# Altium PCB FinalBoard.PcbDoc
Units mil, origin at the board's own origin, x right, y up, seen from the top; angles counter-clockwise.
Board outline 7840 x 6265 mil, 2 copper layers (Top Layer, Bottom Layer); 73 components, 79 nets, 293 pads, 2 vias.
Unrouted connection lines stored in the file: 156.
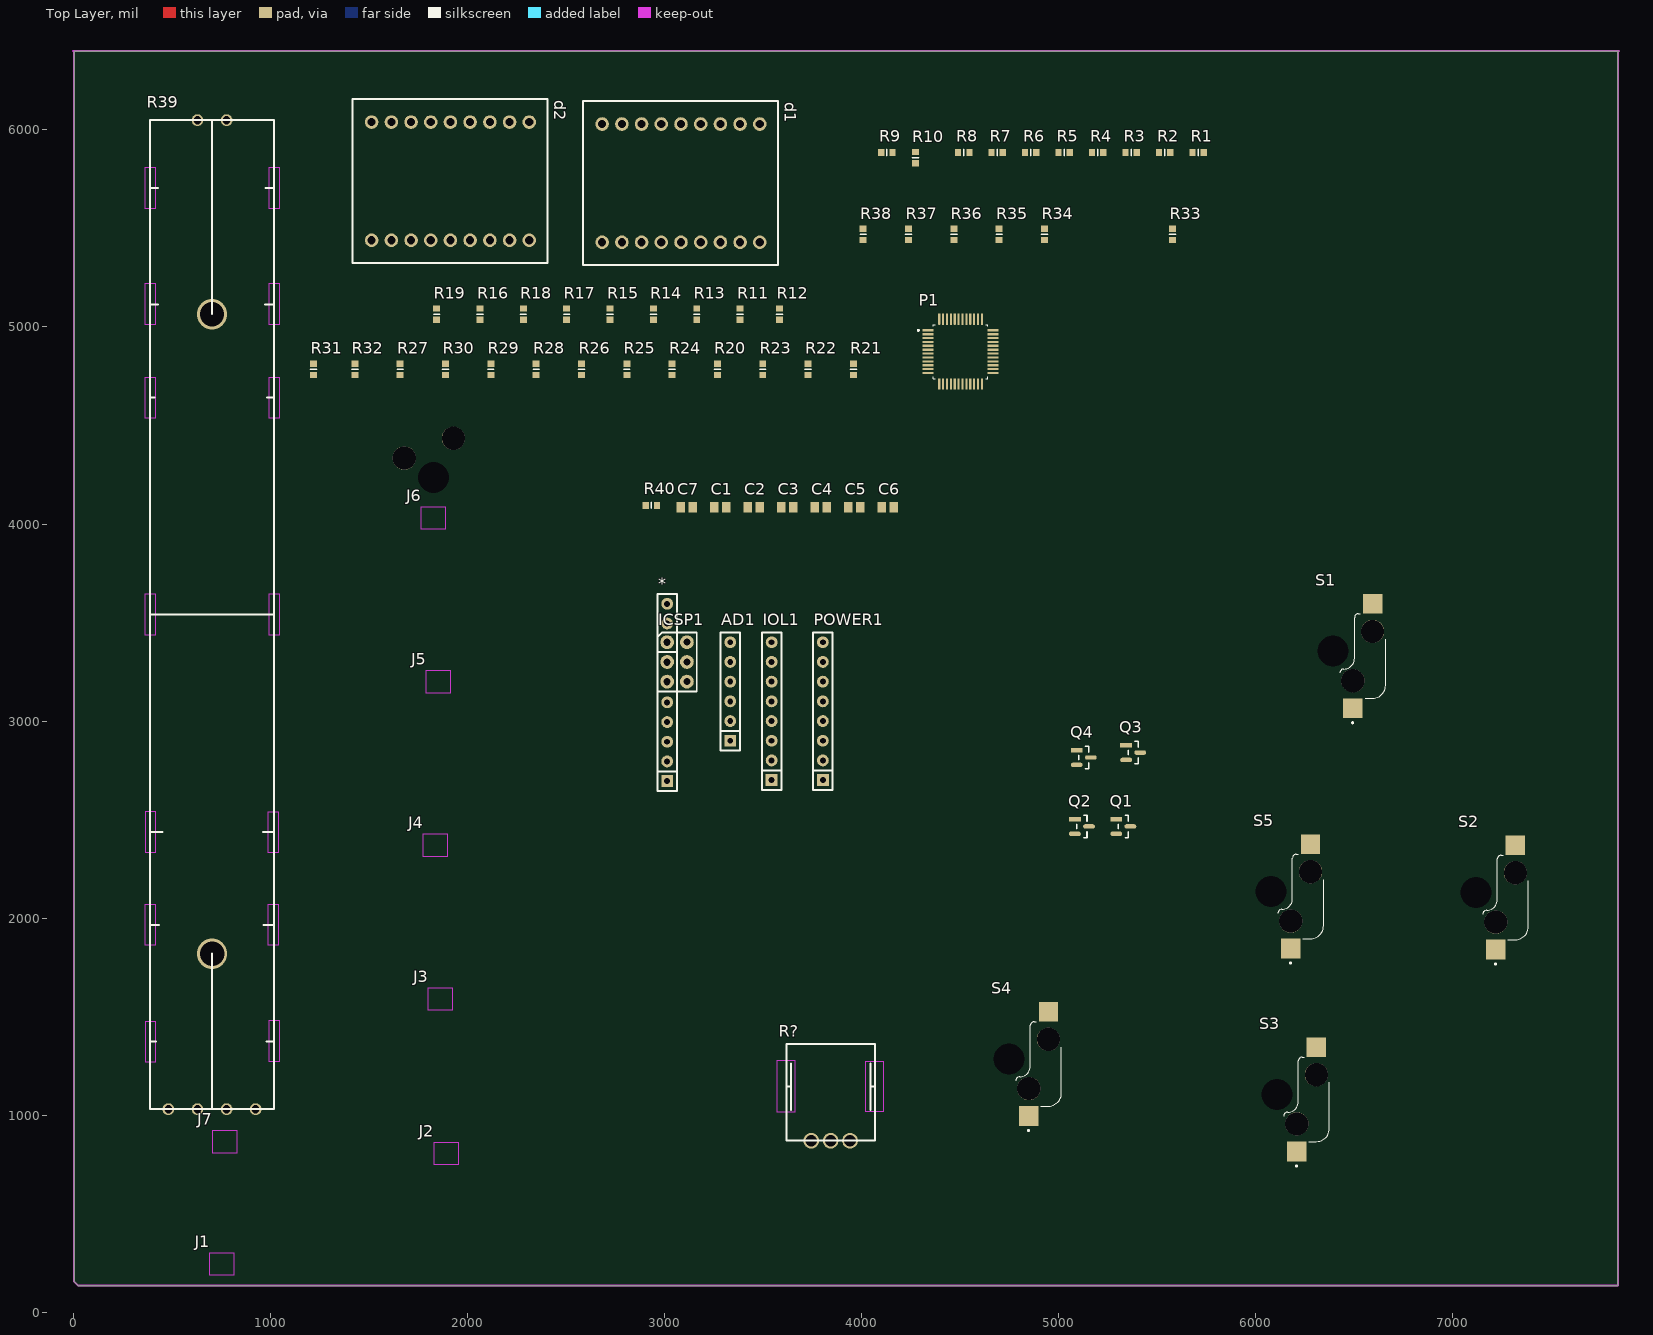
[diagram p0: Top Layer view]
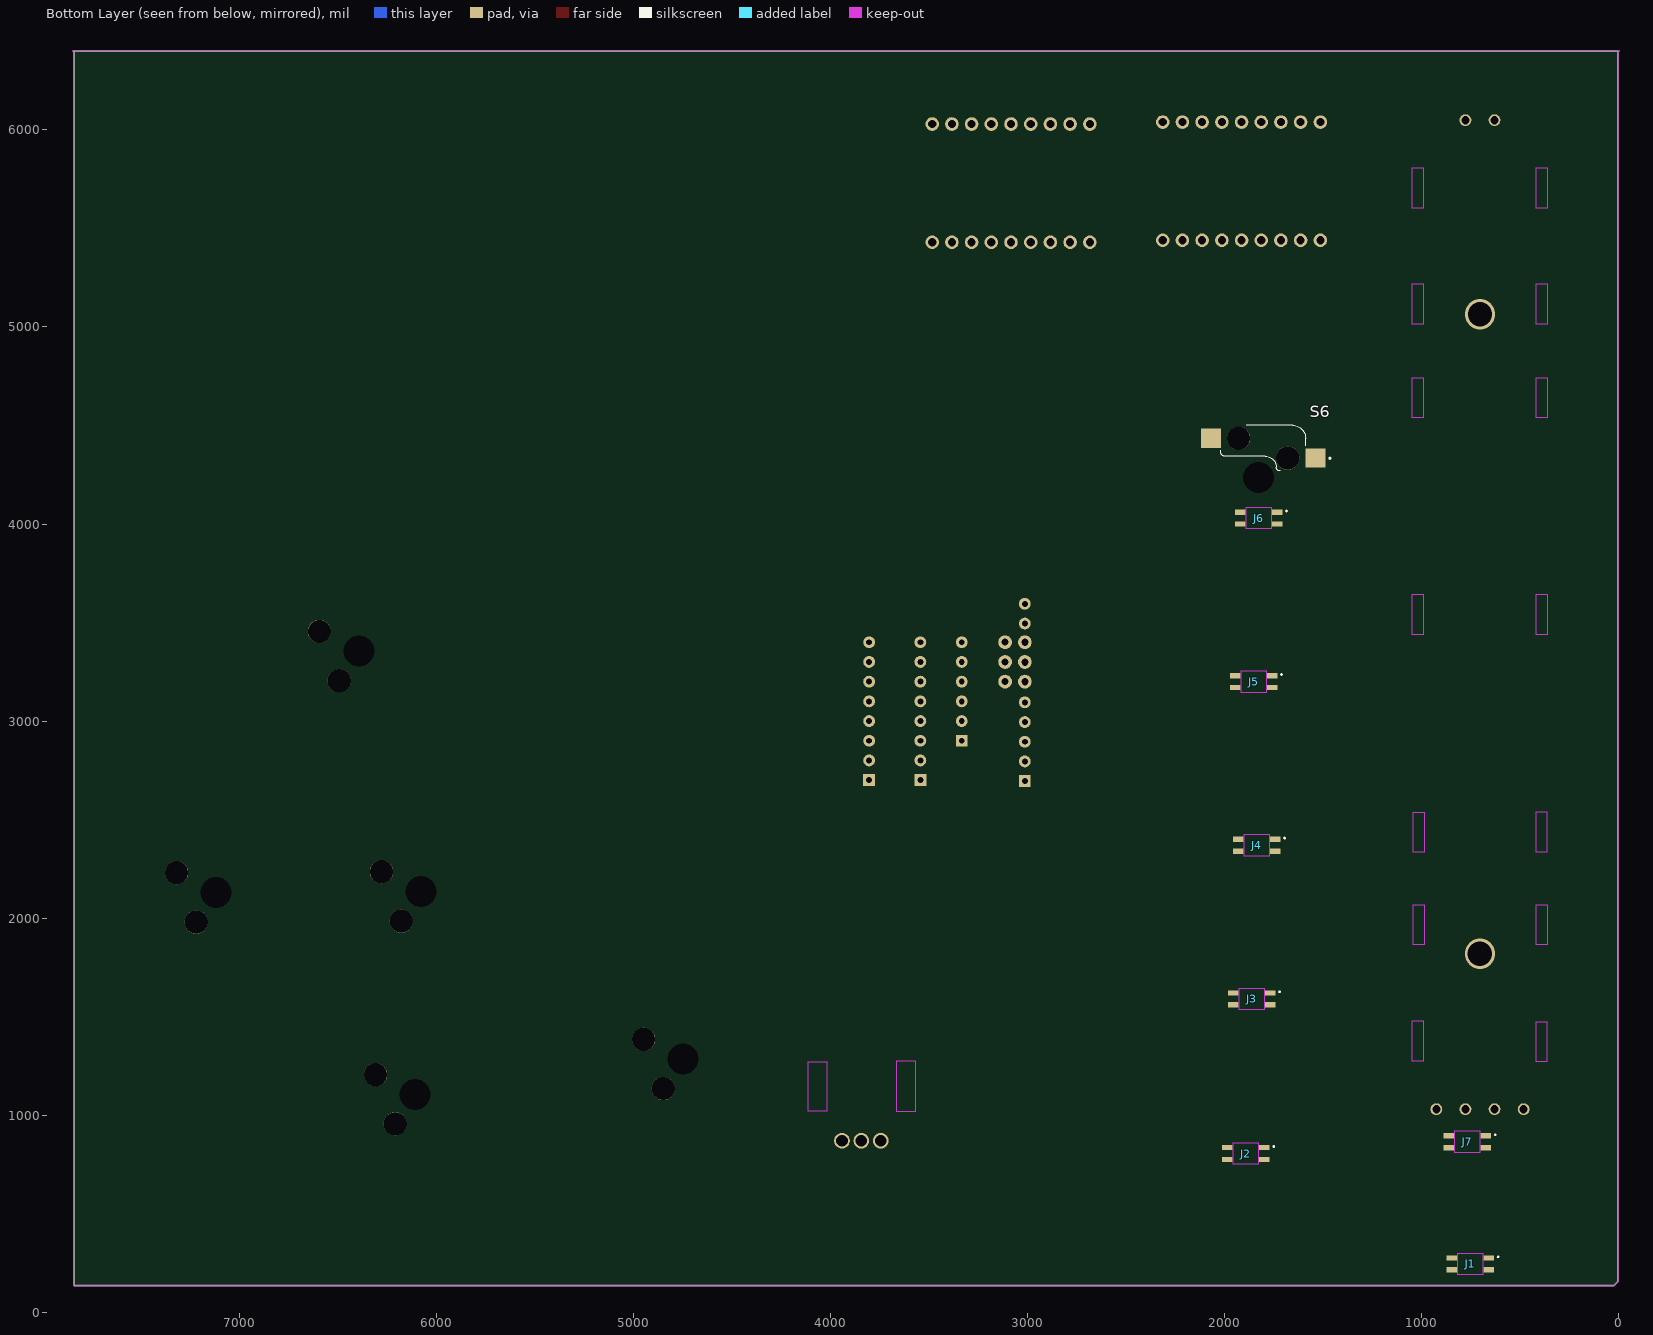
[diagram p1: Bottom Layer view, seen from below]

## Layer stack, top to bottom
Top Solder: solder mask 0.4, Solder Resist, Dk 3.5
Top Layer: signal copper 1.4
Dielectric 1: dielectric 12.6, FR-4, Dk 4.8
Bottom Layer: signal copper 1.4
Bottom Solder: solder mask 0.4, Solder Resist, Dk 3.5

## Board outline
25,135 5,155 5,6400 7845,6400 7840,6395 7840,135

## Design rules (kind name [scope] priority, off if disabled: settings)
Clearance [All] p1: gap=10 ignorepadtopadclearanceinfootprint=FALSE except(0: Arc-Hole Track-Hole SMDPad-Hole THPad-Hole Via-Hole Fill-Hole Poly-Hole Region-Hole Text-Hole)
PolygonConnect [All] p1: connectstyle=Relief reliefconductorwidth=10 reliefentries=4 polygonreliefangle="90 Angle" airgapwidth=10
RoutingVias [All] p1: holewidth=28 width=50 viastyle="Through Hole" minholewidth=28 minwidth=50 maxholewidth=28 maxwidth=50
SolderMaskExpansion [All] p1: expansion=4 istentingtop=FALSE
Width [All] p1: maxlimit=10 minlimit=10 preferedwidth=10
30 further rules are at their usual default settings.

## Components (designator, comment, footprint, x,y, rotation, side; value= is the part's Value field where it differs from the comment)
* "IOH" "Header 10x1 8.5mm" 3015,2695 r90 top
AD1 "AD" "Header 6x1 8.5mm" 3335,2900 r90 top
C1 "104uF, 20%" 0805_CAP_HD 3285,4085 r0 top
C2 "104uF, 20%" 0805_CAP_HD 3455,4085 r0 top
C3 "104uF, 20%" 0805_CAP_HD 3625,4085 r0 top
C4 "104uF, 20%" 0805_CAP_HD 3795,4085 r0 top
C5 "104uF, 20%" 0805_CAP_HD 3965,4085 r0 top
C6 "104uF, 20%" 0805_CAP_HD 4135,4085 r0 top
C7 "104uF, 20%" 0805_CAP_HD 3115,4085 r0 top
d1 "segdisplay" PCBComponent_1 2503.31,5314.23 r0 top
d2 "segdisplay" PCBComponent_1 1333.31,5324.23 r0 top
ICSP1 "ICSP" ICSP 3015,3400 r0 top
IOL1 "IOL" "Header 8x1 8.5mm" 3545,2700 r90 top
J1 "SK6812MINI" LED-3535 781,244.87 r180 top
J2 "SK6812MINI" LED-3535 1920,805 r180 top
J3 "SK6812MINI" LED-3535 1890,1590 r180 top
J4 "SK6812MINI" LED-3535 1865,2370 r180 top
J5 "SK6812MINI" LED-3535 1880,3200 r180 top
J6 "SK6812MINI" LED-3535 1855,4030 r180 top
J7 "SK6812MINI" LED-3535 796,864.87 r180 top
P1 "PCU9656B" QFP50P900X900X160-48N 4503.9,4874.76 r0 top
POWER1 "POWER_UNO" "Header 8x1 8.5mm" 3805,2700 r90 top
Q1 "BSS138" FP-318-08-IPC_B 5330,2465 r0 top
Q2 "BSS138" FP-318-08-IPC_B 5120,2465 r0 top
Q3 "BSS138" FP-318-08-IPC_B 5380,2840 r0 top
Q4 "BSS138" FP-318-08-IPC_B 5129.17,2815 r0 top
R1 "10K, 1%" 0603_RES_HD 5710,5885 r0 top
R2 "10K, 1%" 0603_RES_HD 5540,5885 r0 top
R3 "10K, 1%" 0603_RES_HD 5370,5885 r0 top
R4 "10K, 1%" 0603_RES_HD 5200,5885 r0 top
R5 "10K, 1%" 0603_RES_HD 5030,5885 r0 top
R6 "10K, 1%" 0603_RES_HD 4860,5885 r0 top
R7 "10K, 1%" 0603_RES_HD 4690,5885 r0 top
R8 "10K, 1%" 0603_RES_HD 4520,5885 r0 top
R9 "10K, 1%" 0603_RES_HD 4130,5885 r0 top
R10 "10K, 1%" 0603_RES_HD 4275,5860 r90 top
R11 "10K, 1%" 0603_RES_HD 3385,5065 r90 top
R12 "10K, 1%" 0603_RES_HD 3585,5065 r90 top
R13 "10K, 1%" 0603_RES_HD 3165,5065 r90 top
R14 "10K, 1%" 0603_RES_HD 2945,5065 r90 top
R15 "10K, 1%" 0603_RES_HD 2725,5065 r90 top
R16 "10K, 1%" 0603_RES_HD 2065,5065 r90 top
R17 "10K, 1%" 0603_RES_HD 2505,5065 r90 top
R18 "10K, 1%" 0603_RES_HD 2285,5065 r90 top
R19 "10K, 1%" 0603_RES_HD 1845,5065 r90 top
R20 "10K, 1%" 0603_RES_HD 3270,4785 r90 top
R21 "10K, 1%" 0603_RES_HD 3960,4785 r90 top
R22 "10K, 1%" 0603_RES_HD 3730,4785 r90 top
R23 "10K, 1%" 0603_RES_HD 3500,4785 r90 top
R24 "10K, 1%" 0603_RES_HD 3040,4785 r90 top
R25 "10K, 1%" 0603_RES_HD 2810,4785 r90 top
R26 "10K, 1%" 0603_RES_HD 2580,4785 r90 top
R27 "10K, 1%" 0603_RES_HD 1660,4785 r90 top
R28 "10K, 1%" 0603_RES_HD 2350,4785 r90 top
R29 "10K, 1%" 0603_RES_HD 2120,4785 r90 top
R30 "10K, 1%" 0603_RES_HD 1890,4785 r90 top
R31 "10K, 1%" 0603_RES_HD 1220,4785 r90 top
R32 "10K, 1%" 0603_RES_HD 1430,4785 r90 top
R33 "10K, 1%" 0603_RES_HD 5580,5470 r90 top
R34 "10K, 1%" 0603_RES_HD 4930,5470 r90 top
R35 "10K, 1%" 0603_RES_HD 4700,5470 r90 top
R36 "10K, 1%" 0603_RES_HD 4470,5470 r90 top
R37 "10K, 1%" 0603_RES_HD 4240,5470 r90 top
R38 "10K, 1%" 0603_RES_HD 4010,5470 r90 top
R39 "10k" sliderpot 410,1155 r90 top
R40 "10K, 1%" 0603_RES_HD 2935,4095 r0 top
R? "normalpot" normalpot 3785,1065 r0 top
S1 "PG151101S11" SW_PG151101S11 6545,3330 r90 top
S2 "PG151101S11" SW_PG151101S11 7270,2105 r90 top
S3 "PG151101S11" SW_PG151101S11 6260,1080.24 r90 top
S4 "PG151101S11" SW_PG151101S11 4900,1260 r90 top
S5 "PG151101S11" SW_PG151101S11 6230,2110 r90 top
S6 "PG151101S11" SW_PG151101S11 1805,4385 r0 bottom

## Footprints (in the part's own frame and the unit in brackets; to place one, negate y for a bottom-side part, rotate by r counter-clockwise, add the part's x,y. Pads: shape width x height; smd on the part's side, far side on the other; paste and mask are expansions set on the pad)
0603_RES_HD [mm] "Chip Resistor, 2-Leads, Body 1.60x0.85mm, IPC High Density"
  rect 0.8x0.9 smd: 1(-0.725,0) 2(0.725,0)
  silkscreen extent 0,-0.4 0,0.4, body extent -0.87,-0.48 0.87,0.48, height 0.55
0805_CAP_HD [mm] "Chip Capacitor, 2-Leads, Body 2.00x1.25mm, IPC High Density"
  rect 1.1x1.4 smd: 1(-0.775,0) 2(0.775,0)
  body extent -1.1,-0.72 1.1,0.73, height 1.4
FP-318-08-IPC_B [mm]
  rect 1.524x0.578 smd paste+0 mask+0: 1(-0.91,0.95)
  rrect100% 1.524x0.578 smd paste+0 mask+0: 2(-0.91,-0.95) 3(0.91,0)
  silkscreen extent -0.65,-1.45 0.65,1.45, body extent -1.92,-1.7 1.92,1.7, height 0.25
"Header 6x1 8.5mm" [mil] "Stackable 6 pin header"
  rect 60x60 hole 30: 1(0,0)
  round 60 hole 30: 2(100,0) 3(200,0) 4(300,0) 5(400,0) 6(500,0)
  silkscreen extent -50,-50 550,50, body extent -50,-50 550,50, height 335
"Header 8x1 8.5mm" [mil] "Stackable 8 pin header"
  rect 60x60 hole 30: 1(0,0)
  round 60 hole 30: 2(100,0) 3(200,0) 4(300,0) 5(400,0) 6(500,0) 7(600,0) 8(700,0)
  silkscreen extent -50,-50 750,50, body extent -50,-50 750,50, height 335
"Header 10x1 8.5mm" [mil] "Stackable 10 pin header"
  rect 60x60 hole 30: 1(0,0)
  round 60 hole 30: 2(100,0) 3(200,0) 4(300,0) 5(400,0) 6(500,0) 7(600,0) 8(700,0) 9(800,0) 10(900,0)
  silkscreen extent -50,-50 950,50, body extent -50,-50 950,50, height 335
ICSP [mil]
  round 70 hole 35.43: 1(0,0) 2(100,0) 3(0,-100) 4(100,-100) 5(0,-200) 6(100,-200)
  silkscreen extent -50,-250 150,50, body extent -50,-250 150,50, height 485
LED-3535 [mm]
  rect 1.34x0.68 smd far side: 1(-1.702,0.765) 2(-1.702,-0.765) 3(3.073,-0.765) 4(3.073,0.765)
  Keep-Out Layer region: -0.914,-1.397 2.286,-1.397 2.286,1.403 -0.914,1.403
normalpot [mil]
  round 79.5 hole 59.06: 1(-39.02,-195) 2(59.41,-195) 3(157.83,-195)
  Keep-Out Layer region: 236,-45 330,-45 330,207 236,207
  Keep-Out Layer region: -213,-49 -119,-49 -119,210 -213,210
  silkscreen extent -165,-195 284,297
PCBComponent_1 [mm]
  round 1.75 hole 1.05: 1(4.615,18.181) 2(7.155,18.181) 3(9.695,18.181) 4(12.235,18.181) 5(14.775,18.181) 6(17.315,18.181) 7(19.855,18.181) 8(22.395,18.181) 9(24.935,18.181) 10(4.615,2.941) 11(7.155,2.941) 12(9.695,2.941) 13(12.235,2.941) 14(14.775,2.941) 15(17.315,2.941) 16(19.855,2.941) 17(22.395,2.941) 18(24.935,2.941)
  silkscreen extent 2.16,0 27.26,21.15
QFP50P900X900X160-48N [mm]
  rrect25% 1.44x0.28 smd: 1(-4.185,2.75) 2(-4.185,2.25) 3(-4.185,1.75) 4(-4.185,1.25) 5(-4.185,0.75) 6(-4.185,0.25) 7(-4.185,-0.25) 8(-4.185,-0.75) 9(-4.185,-1.25) 10(-4.185,-1.75) 11(-4.185,-2.25) 12(-4.185,-2.75) 25(4.185,-2.75) 26(4.185,-2.25) 27(4.185,-1.75) 28(4.185,-1.25) 29(4.185,-0.75) 30(4.185,-0.25) 31(4.185,0.25) 32(4.185,0.75) 33(4.185,1.25) 34(4.185,1.75) 35(4.185,2.25) 36(4.185,2.75)
  rrect25% 0.28x1.44 smd: 13(-2.75,-4.185) 14(-2.25,-4.185) 15(-1.75,-4.185) 16(-1.25,-4.185) 17(-0.75,-4.185) 18(-0.25,-4.185) 19(0.25,-4.185) 20(0.75,-4.185) 21(1.25,-4.185) 22(1.75,-4.185) 23(2.25,-4.185) 24(2.75,-4.185) 37(2.75,4.185) 38(2.25,4.185) 39(1.75,4.185) 40(1.25,4.185) 41(0.75,4.185) 42(0.25,4.185) 43(-0.25,4.185) 44(-0.75,4.185) 45(-1.25,4.185) 46(-1.75,4.185) 47(-2.25,4.185) 48(-2.75,4.185)
  silkscreen extent -5.54,-3.5 3.5,3.5, body extent -4.5,-4.5 4.5,4.5, height 1.6
sliderpot [mil]
  round 60 hole 41.34: 1(-125,-221.09) 2(-125,-73.46) 3(4894.37,-221.09) (1)(-125,-368.73) (2)(-125,-516.37) (3)(4894.37,-368.73)
  Keep-Out Layer region: 115.28,45 115.28,-10.12 320,-10.12 320,45
  Keep-Out Layer region: 708.48,46.52 708.48,-8.6 913.2,-8.6 913.2,46.52
  Keep-Out Layer region: 708.48,-578.48 708.48,-633.6 913.2,-633.6 913.2,-578.48
  Keep-Out Layer region: 1178.48,-578.48 1178.48,-633.6 1383.2,-633.6 1383.2,-578.48
  Keep-Out Layer region: 118.48,-583.48 118.48,-638.6 323.2,-638.6 323.2,-583.48
  Keep-Out Layer region: 2283.48,-583.48 2283.48,-638.6 2488.2,-638.6 2488.2,-583.48
  Keep-Out Layer region: 2283.48,46.52 2283.48,-8.6 2488.2,-8.6 2488.2,46.52
  Keep-Out Layer region: 3383.48,46.52 3383.48,-8.6 3588.2,-8.6 3588.2,46.52
  Keep-Out Layer region: 3383.48,-583.48 3383.48,-638.6 3588.2,-638.6 3588.2,-583.48
  Keep-Out Layer region: 4448.48,-583.48 4448.48,-638.6 4653.2,-638.6 4653.2,-583.48
  Keep-Out Layer region: 4448.48,46.52 4448.48,-8.6 4653.2,-8.6 4653.2,46.52
  Keep-Out Layer region: 3858.48,46.52 3858.48,-8.6 4063.2,-8.6 4063.2,46.52
  Keep-Out Layer region: 3858.48,-583.48 3858.48,-638.6 4063.2,-638.6 4063.2,-583.48
  Keep-Out Layer region: 1180.28,45.12 1180.28,-10 1385,-10 1385,45.12
  silkscreen extent -125,-610 4895,20
SW_PG151101S11 [mm]
  rect 2.55x2.5 smd: 1(-6.725,1.27) 2(6.725,-1.27)
  round 3 hole 3 unplated: ""(-3.175,1.27) ""(3.175,-1.27)
  round 3 hole 3.988 unplated: ""(0.635,3.81)
  silkscreen extent -8.7,-2.95 5.45,2.94

## Part data
*: Supplier Part Number 1=2698789, Supplier 1=Arrow, Supplier 2=Arrow, Supplier 3=Digi-Key, Supplier Part Number 2=2698803S4475693N1004, Supplier Part Number 3=SAM1198-10-ND
AD1: Supplier Part Number 1=52553843, Supplier 1=Arrow, Supplier 2=Arrow, Supplier 3=Digi-Key, Supplier 4=Newark, Supplier Part Number 2=2699089, Supplier Part Number 3=SAM1198-06-ND, Supplier Part Number 4=11P8269
C1 C2 C3 C4 C5 C6 C7: library part 08056D226MAT2A, "22uF, 20%, 6.3V", Manufacturer 1=AVX, Supplier Part Number 1=478-3647-1-ND, GFUPartNo=08056D226MAT2A, Manufacturer Part Number 1=08056D226MAT2A, PackageReference=0805, Part Type=SMT, Supplier 1=Digi-Key
ICSP1: Supplier Part Number 1=SAM1185-03-ND, Supplier 1=Digi-Key, Supplier 2=Arrow, Supplier 3=Arrow, Supplier Part Number 2=2699340, Supplier Part Number 3=46091550
IOL1 POWER1: Supplier Part Number 1=2698925, Supplier 1=Arrow
  IOL1: Supplier 2=Arrow, Supplier 3=Digi-Key, Supplier Part Number 2=2698940, Supplier Part Number 3=SAM1198-08-ND
  POWER1: Supplier 2=Digi-Key, Supplier 3=Arrow, Supplier Part Number 2=SAM1198-08-ND, Supplier Part Number 3=2698940
J1 J2 J3 J4 J5 J6 J7: "INTEGRATED LIGHT SOURCE INTELLIGENT CONTROL OF CHIP-ON-TOP SMD TYPE LED", Package=Package, Availability="Not in stock", Check_prices=https://www.snapeda.com/parts/SK6812MINI/DONGGUANG+OPSCO+OPTOELECTRONICS+CO.%252C+LTD/view-part/?ref=eda, MF="DONGGUANG OPSCO OPTOELECTRONICS CO., LTD", MP=SK6812MINI, Price=None, SnapEDA_Link=https://www.snapeda.com/parts/SK6812MINI/DONGGUANG+OPSCO+OPTOELECTRONICS+CO.%252C+LTD/view-part/?ref=snap
Q1 Q2 Q3 Q4: library part CMP-07173-000101-1, "MOSFET N-CH 50V 220MA SOT-23", Case/Package=SOT-23, Continuous Drain Current (ID)=220mA, Drain to Source Breakdown Voltage=50V, Drain to Source Resistance=3.5R, Gate to Source Voltage (Vgs)=20V, Input Capacitance=27pF, Max Operating Temperature=150°C, Max Power Dissipation=360mW, Min Operating Temperature=-55°C, On-State Resistance=6R, Package Quantity=1, Threshold Voltage=1.3V, Contact Plating=Tin, Current Rating=220mA, Drain to Source Voltage (Vdss)=50V, Dual Supply Voltage=50V, Element Configuration=Single, Fall Time=9ns, Height=0.93mm, Lead Free="Lead Free", Length=2.92mm, Mount="Surface Mount", Nominal Vgs=1.3V, Number of Elements=1, Number of Pins=3, Packaging="Tape and Reel", Power Dissipation=360mW, Radiation Hardening=No, Rds On Max=3.5R, REACH SVHC="No SVHC", Rise Time=9ns, Termination=SMD/SMT, Turn-Off Delay Time=20ns, Turn-On Delay Time=2.5ns, Voltage Rating (DC)=50V, Weight=0.03g, Width=1.3mm
R1 R2 R3 R4 R5 R6 R7 R8 R9 R10 R11 R12 R13 R14 R15 R16 R17 R18 R19 R20 R21 R22 R23 R24 R25 R26 R27 R28 R29 R30 R31 R32 R33 R34 R35 R36 R37 R38 R40: library part CRCW060316K5FKEA, "RES 16.5K OHM 1/10W 1% 0603 SMD", Manufacturer 1=Vishay, Supplier Part Number 1=541-16.5KHCT-ND, GFUPartNo=CRCW060316K5FKEA, Manufacturer Part Number 1=CRCW060316K5FKEA, Part Type=SMT, Supplier 1=Digi-Key
R39: library part sliderpot
S1 S2 S3 S4 S5 S6: "Keyswitch", Package=Package, Availability=Unavailable, MF=Kailh, MP=PG151101S11, Price=None, SnapEDA_Link=https://www.snapeda.com/parts/PG151101S11/Kailh/view-part/4218555/?ref=snap

## Via types
v1: diameter 154.02, hole 124.02, Top Layer to Bottom Layer, 2 vias

## Nets (pads, with @x,y where several pads share a name; then routed paths per layer and width w, separated by ;. In a path a pad name is that pad's centre, name@x,y a point inside that pad or via, vN(x,y) a via of type N, cw(c..) or ccw(c..) an arc to the next point about the centre after c; other vN are vias at no path point)
3V3: POWER1.5 Q1.2 Q2.2 Q3.2 Q4.2 R9.1 R12.1 R20.1 R24.1 R39.1 R40.1 R?.2
5V: C1.1 C2.1 C3.1 C4.1 C5.1 C6.1 C7.1 J1.1 J2.1 J3.1 J4.1 J5.1 J6.1 J7.1 P1.40 POWER1.4
A: P1.9 R4.1 R25.1
AD0: AD1.1 R39.2
AD1: AD1.2 R?.3
B: P1.8 R2.1 R22.1
BLANK1: d1.11 R19.2
BLANK1_CTL: P1.2 Q2.1 R12.2
BLANK2: d1.16 R16.2
BLANK2_CTL: P1.3 Q1.1 R9.2
BLANK3: d2.11 R32.2
BLANK3_CTL: P1.4 Q4.1 R24.2
BLANK4: d2.16 R27.2
BLANK4_CTL: P1.5 Q3.1 R20.2
C: P1.34 R18.2 R38.2
D: P1.32 R13.2 R34.2
DP: P1.33 R15.2 R36.2
E: P1.20 R1.2 R21.2
F: P1.19 R17.1 R37.1
G1: P1.10 R6.1 R28.1
G2: P1.29 R10.2 R31.2
GND: *.7 C1.2 C2.2 C3.2 C4.2 C5.2 C6.2 C7.2 J1.3 J2.3 J3.3 J4.3 J5.3 J6.3 J7.3 P1.24 POWER1.2 POWER1.3 R39.3 R?.1
H: P1.18 R14.1 R35.1
IO1: IOL1.2 S6.1
IO2: IOL1.3 S5.1
IO3: IOL1.4 S4.1
IO4: IOL1.5 S3.1
IO5: IOL1.6 S2.1
IO6: IOL1.7 S1.1
J: P1.17 R11.1 R33.1
K: P1.11 R8.1 R30.1
L: P1.26 R3.2 R23.2
LEDDATA: *.3 J1.4
M: P1.27 R5.2 R26.2
N: P1.28 R7.2 R29.2
Netd1_1: d1.1 R1.1
Netd1_2: d1.2 R3.1
Netd1_4: d1.4 R5.1
Netd1_5: d1.5 R7.1
Netd1_6: d1.6 R10.1
Netd1_7: d1.7 R13.1
Netd1_8: d1.8 R15.1
Netd1_9: d1.9 R18.1
Netd1_10: d1.10 R2.2
Netd1_12: d1.12 R4.2
Netd1_13: d1.13 R6.2
Netd1_14: d1.14 R8.2
Netd1_15: d1.15 R11.2
Netd1_17: d1.17 R14.2
Netd1_18: d1.18 R17.2
Netd2_1: d2.1 R21.1
Netd2_2: d2.2 R23.1
Netd2_4: d2.4 R26.1
Netd2_5: d2.5 R29.1
Netd2_6: d2.6 R31.1
Netd2_7: d2.7 R34.1
Netd2_8: d2.8 R36.1
Netd2_9: d2.9 R38.1
Netd2_10: d2.10 R22.2
Netd2_12: d2.12 R25.2
Netd2_13: d2.13 R28.2
Netd2_14: d2.14 R30.2
Netd2_15: d2.15 R33.2
Netd2_17: d2.17 R35.2
Netd2_18: d2.18 R37.2
NetJ1_2: J1.2 J2.4
NetJ2_2: J2.2 J3.4
NetJ3_2: J3.2 J4.4
NetJ4_2: J4.2 J5.4
NetJ5_2: J5.2 J6.4
NetJ6_2: J6.2 J7.4
NetQ1_3: Q1.3 R16.1
NetQ2_3: Q2.3 R19.1
NetQ3_3: Q3.3 R27.1
NetQ4_3: Q4.3 R32.1
NetR40_2: R40.2 S1.2 S2.2 S3.2 S4.2 S5.2 S6.2
SCL: *.10 P1.38
SDA: *.9 P1.39
VSS: P1.1 P1.6 P1.7 P1.12 P1.16 P1.21 P1.25 P1.30 P1.31 P1.36 P1.37 P1.45 P1.48
pads on no net: *.1 *.2 *.4 *.5 *.6 *.8 AD1.3 AD1.4 AD1.5 AD1.6 d1.3 d2.3 ICSP1.1 ICSP1.2 ICSP1.3 ICSP1.4 ICSP1.5 ICSP1.6 IOL1.1 IOL1.8 J7.2 P1.13 P1.14 P1.15 P1.22 P1.23 P1.35 P1.41 P1.42 P1.43 P1.44 P1.46 P1.47 POWER1.1 POWER1.6 POWER1.7 POWER1.8 R39.(1) R39.(2) R39.(3) S1. S2. S3. S4. S5. S6.
copper on no net:
  other v1: 705.04,1819.37 704.96,5065.04

## Keep-outs
Keep-Out Layer:
  lines w10: 0,6400 7845,6400 7840,6395 7840,135 25,135 5,155 5,6400